# Altium PCB PCB10_10.PcbDoc
Units mil, origin at the board's own origin, x right, y up, seen from the top; angles counter-clockwise.
Board outline 6000 x 4000 mil, 2 copper layers (Top Layer, Bottom Layer); 13 components, 30 nets, 197 pads, 7 vias.
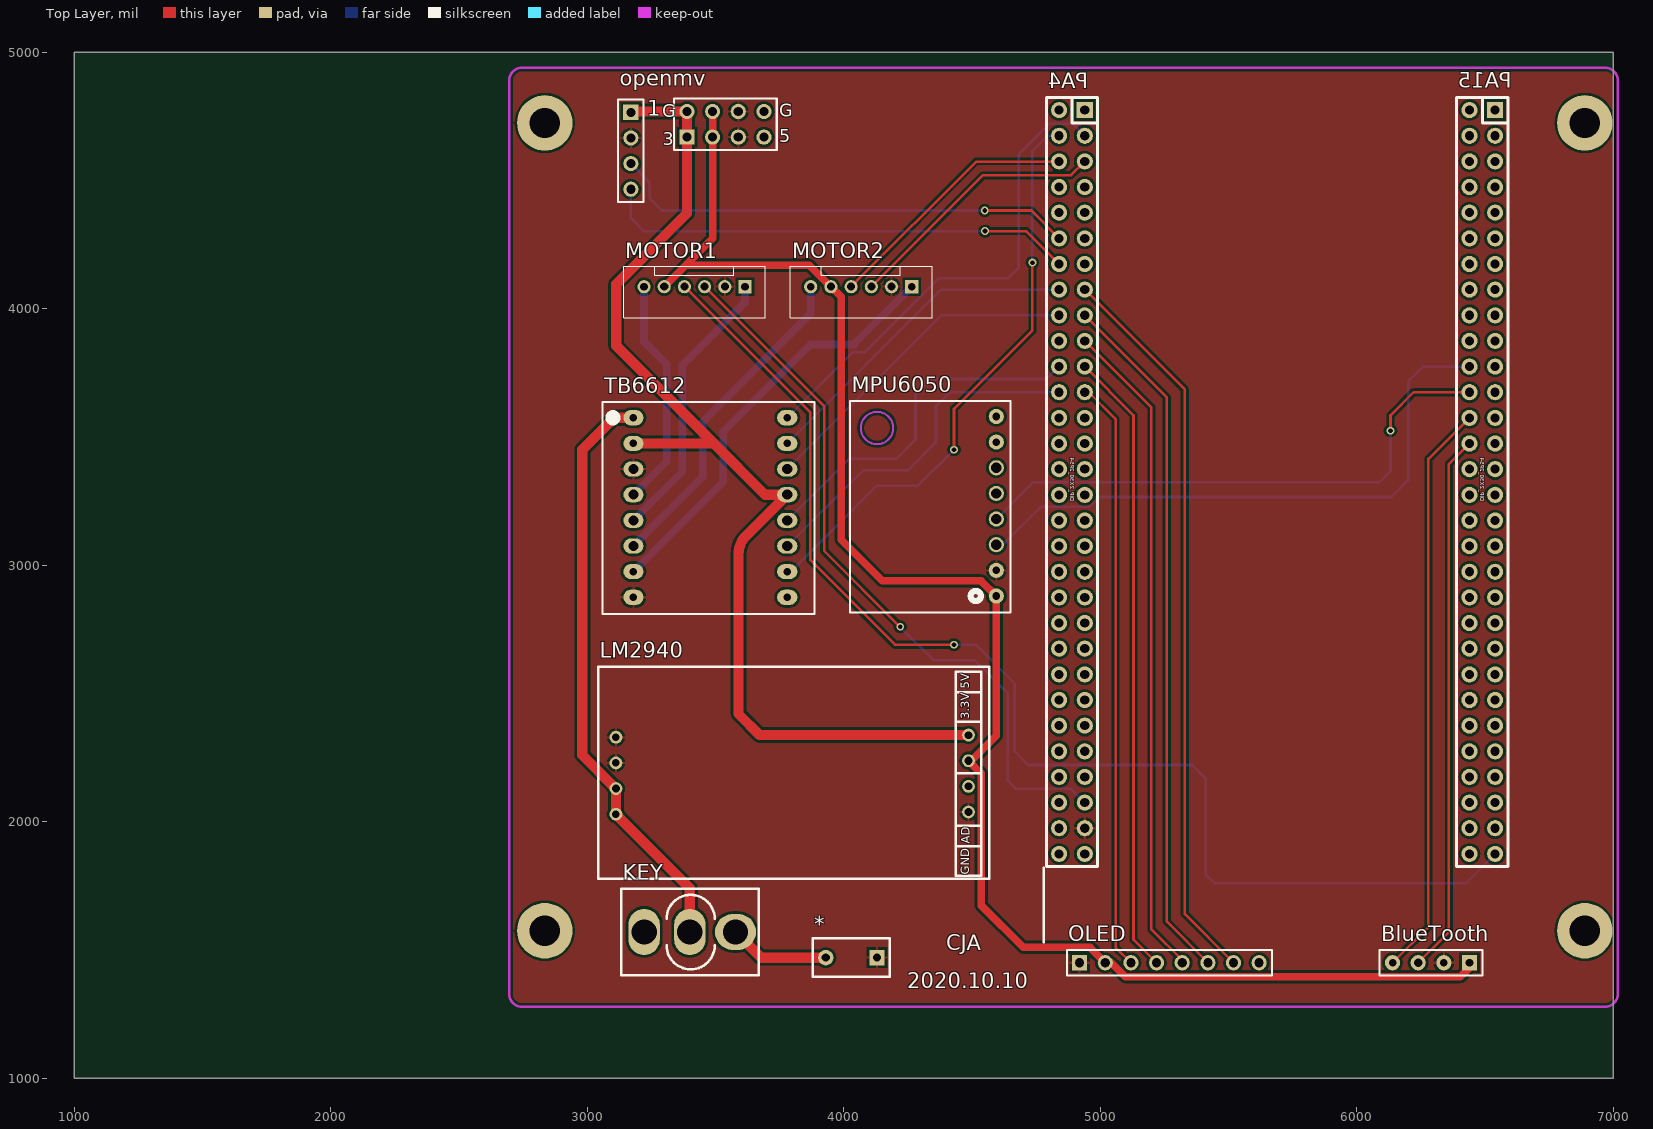
[diagram p0: Top Layer view]
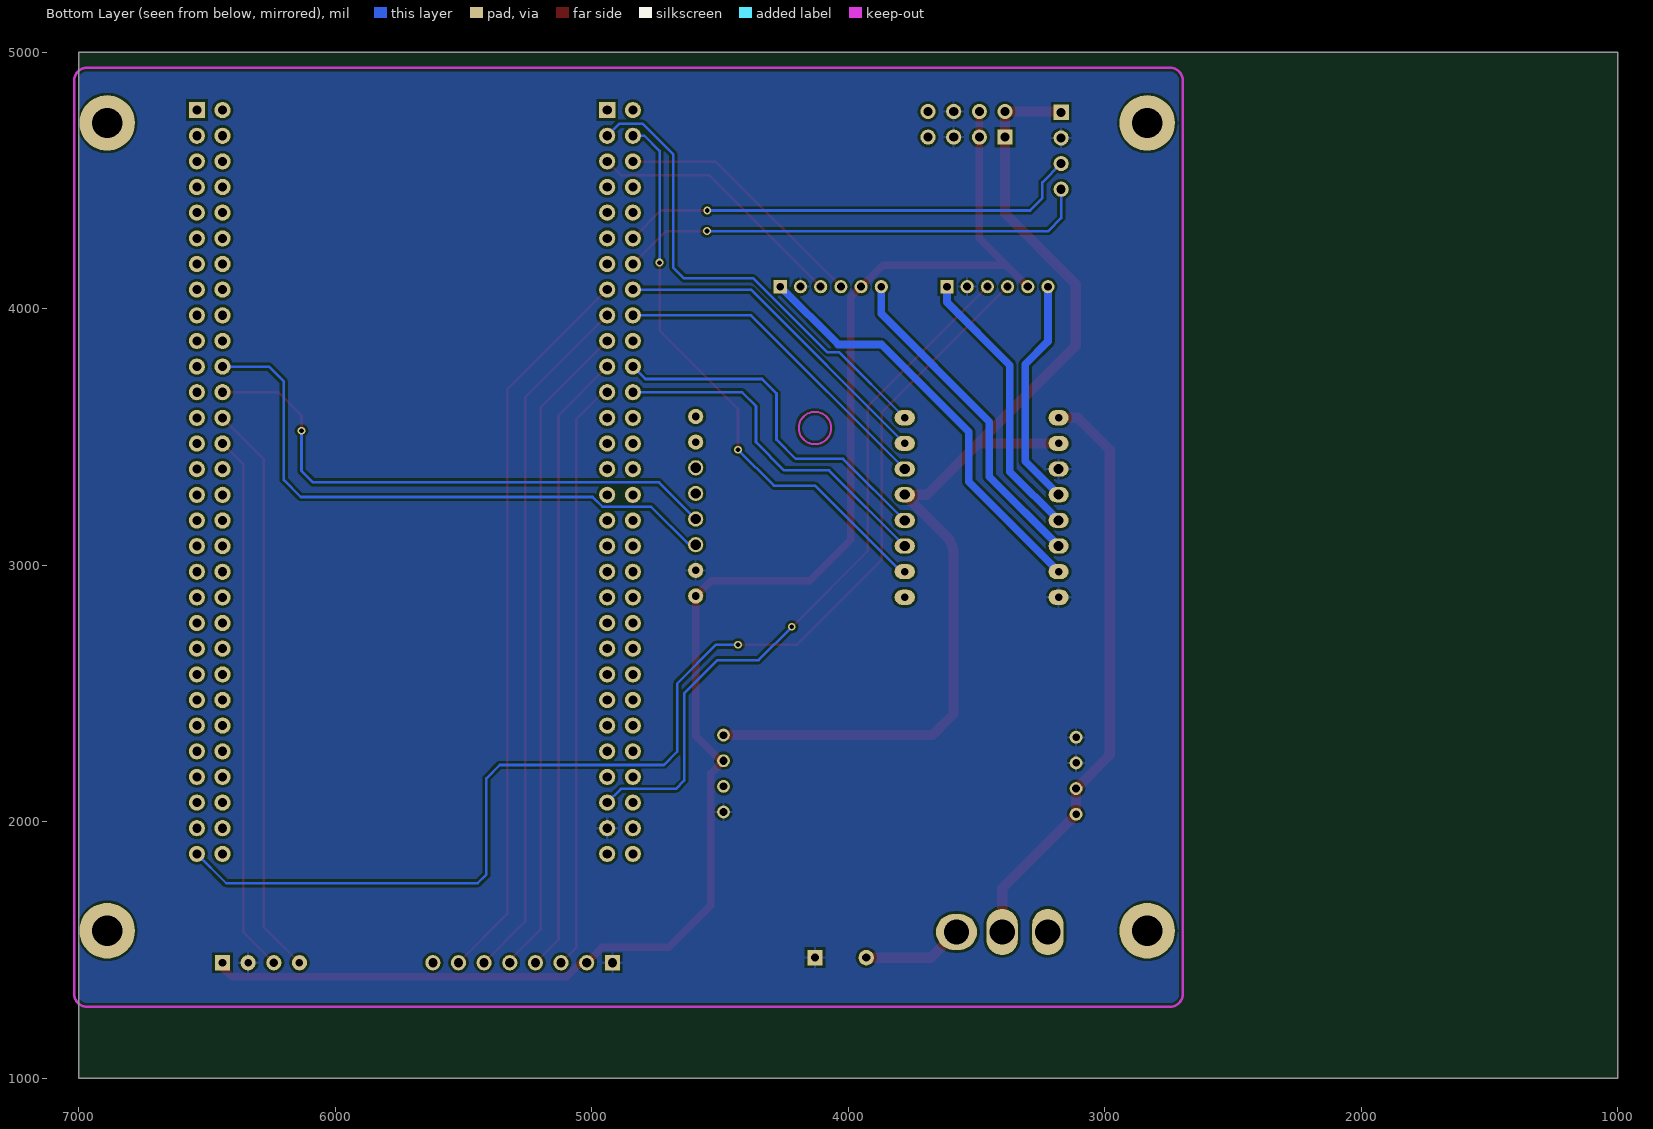
[diagram p1: Bottom Layer view, seen from below]

## Layer stack, top to bottom
Top Solder: solder mask 0.4, Solder Resist, Dk 3.5
Top Layer: signal copper 1.4
Dielectric 1: dielectric 12.6, FR-4, Dk 4.8
Bottom Layer: signal copper 1.4
Bottom Solder: solder mask 0.4, Solder Resist, Dk 3.5

## Board outline
1000,1000 7000,1000 7000,5000 1000,5000

## Design rules (kind name [scope] priority, off if disabled: settings)
Clearance [All] p1: gap=10
PolygonConnect [All] p1: connectstyle=Relief reliefconductorwidth=10 reliefentries=4 polygonreliefangle="90 Angle" airgapwidth=10
RoutingVias [All] p1: holewidth=28 width=50 viastyle="Through Hole" minholewidth=28 minwidth=50 maxholewidth=28 maxwidth=50
SolderMaskExpansion [All] p1: expansion=4
Width [All] p1: maxlimit=50 minlimit=10 preferedwidth=10
29 further rules are at their usual default settings.

## Components (designator, comment, footprint, x,y, rotation, side; value= is the part's Value field where it differs from the comment)
1 "Header 4X2" HDR2X4 3389,4669 r0 top
* "POWER_IN" POWER_IN 3930,1470 r0 top
BlueTooth "BLUETOOTH" HDR1X4-蓝牙模块 6440,1450 r180 top
KEY "K1" Switch_N 3400,1570 r90 top
LM2940 "LM2940" 9VTO5V3.3V稳压模块 3840,2210 r0 top
MOTOR1 "MOTOR" PH-2.0-6P-电机连接座子 3380,4170 r270 top
MOTOR2 "MOTOR" PH-2.0-6P-电机连接座子 4030,4170 r270 top
MPU6050 "MPU6050" MPU6050_模块 4650,3640 r180 top
OLED "Header 8" HDR1X8 4920,1450 r0 top
openmv "Header 4" HDR1X4 3170,4766 r270 top
PA4 "DIP_2X30_2P54" DIP-2X302P54 4890,3315 r90 top
PA15 "DIP_2X30_2P54" DIP-2X302P54 6490,3315 r90 top
TB6612 "TB6612" TB6612_模块 3060,2810 r0 top

## Footprints (in the part's own frame and the unit in brackets; to place one, negate y for a bottom-side part, rotate by r counter-clockwise, add the part's x,y. Pads: shape width x height; smd on the part's side, far side on the other; paste and mask are expansions set on the pad)
9VTO5V3.3V稳压模块 [mm]
  round 1.27 hole 0.75: 1(-18.495,3.025) 2(-18.495,0.485) 4(-18.495,-4.595) 5(16.424,-4.377) 6(16.424,-1.837) 8(16.424,3.243)
  round 1.27 hole 0.813: 3(-18.495,-2.055) 7(16.424,0.703)
  silkscreen extent -20.25,-11 18.5,10, body extent -19.74,-5.87 17.67,4.51, height 8.2
DIP-2X302P54 [mil] "DIP-2X302P54"
  rect 62.99x62.99 / inner round 60 / far side rect 62.99x62.99 hole 35.43: 1(1459.5,-50)
  round 62.99 / inner round 60 / far side round 62.99 hole 35.43: 2(1459.5,50) 3(1359.5,-50) 4(1359.5,50) 5(1259.5,-50) 6(1259.5,50) 7(1159.5,-50) 8(1159.5,50) 9(1059.5,-50) 10(1059.5,50) 11(959.5,-50) 12(959.5,50) 13(859.5,-50) 14(859.5,50) 15(759.5,-50) 16(759.5,50) 17(659.5,-50) 18(659.5,50) 19(559.5,-50) 20(559.5,50) 21(459.5,-50) 22(459.5,50) 23(359.5,-50) 24(359.5,50) 25(259.5,-50) 26(259.5,50) 27(159.5,-50) 28(159.5,50) 29(59.5,-50) 30(59.5,50) 31(-40.5,-50) 32(-40.5,50) 33(-140.5,-50) 34(-140.5,50) 35(-240.5,-50) 36(-240.5,50) 37(-340.5,-50) 38(-340.5,50) 39(-440.5,-50) 40(-440.5,50) 41(-540.5,-50) 42(-540.5,50) 43(-640.5,-50) 44(-640.5,50) 45(-740.5,-50) 46(-740.5,50) 47(-840.5,-50) 48(-840.5,50) 49(-940.5,-50) 50(-940.5,50) 51(-1040.5,-50) 52(-1040.5,50) 53(-1140.5,-50) 54(-1140.5,50) 55(-1240.5,-50) 56(-1240.5,50) 57(-1340.5,-50) 58(-1340.5,50) 59(-1440.5,-50) 60(-1440.5,50)
  silkscreen extent -1490,-100 1510,100
HDR1X4 [mm]
  rect 1.5x1.5 hole 0.9: 1(0,0)
  round 1.5 hole 0.9: 2(2.54,0) 3(5.08,0) 4(7.62,0)
  silkscreen extent -1.27,-1.27 8.89,1.27
HDR1X4-蓝牙模块 [mm] "Connector; Header; 4 Position"
  rect 1.5x1.5 hole 0.75: 1(0,0)
  round 1.5 hole 0.75: 2(2.54,0) 4(7.62,0)
  round 1.5 hole 0.813: 3(5.08,0)
  silkscreen extent -1.27,-1.27 8.89,1.27
HDR1X8 [mm]
  rect 1.5x1.5 hole 0.9: 1(0,0)
  round 1.5 hole 0.9: 2(2.54,0) 3(5.08,0) 4(7.62,0) 5(10.16,0) 6(12.7,0) 7(15.24,0) 8(17.78,0)
  silkscreen extent -1.27,-1.27 19.05,1.27
HDR2X4 [mm]
  rect 1.5x1.5 hole 0.9: 1(0,0)
  round 1.5 hole 0.9: 2(0,2.54) 3(2.54,0) 4(2.54,2.54) 5(5.08,0) 6(5.08,2.54) 7(7.62,0) 8(7.62,2.54)
  silkscreen extent -1.27,-1.27 8.89,3.81
MPU6050_模块 [mm]
  round 1.5 hole 0.75: 1(1.397,19.304) 2(1.397,16.764) 7(1.397,4.064) 8(1.397,1.524)
  round 1.5 hole 1: 3(1.397,14.224) 4(1.397,11.684) 5(1.397,9.144) 6(1.397,6.604)
  Keep-Out Layer circle w0.203: c13.208,2.667 r1.6
  silkscreen extent 0,0 15.88,20.96
PH-2.0-6P-电机连接座子 [mm]
  rect 1.3x1.3 hole 0.75: 1(2.135,5.973)
  round 1.3 hole 0.8: 2(2.135,3.973) 3(2.135,1.973) 4(2.135,-0.027) 5(2.135,-2.027)
  round 1.3 hole 0.75: 6(2.135,-4.027)
  silkscreen extent 0.13,-6.06 5.21,7.99, body extent 0.13,-6.11 5.21,8.04, height 3
POWER_IN [mil]
  round 60 hole 32: 1(0,0)
  rect 60x60 hole 32: 2(200,0)
  silkscreen extent -50,-75 250,75
Switch_N [mm]
  oval 3.556x4.064 hole 2.5: 1(0,-4.521)
  oval 4.6x3.1 hole 2.5: 2(0,0) 3(0,4.521)
  silkscreen extent -4.29,-6.81 4.27,6.78, body extent -4.14,-6.63 3.86,6.57, height 28.35
TB6612_模块 [mm]
  oval 2x1.5 hole 0.75: 1(3.048,19.431) 2(3.048,16.891) 7(3.048,4.191) 8(3.048,1.651) 10(18.288,4.191) 15(18.288,16.891) 16(18.288,19.431)
  oval 2x1.5 hole 1: 3(3.048,14.351) 4(3.048,11.811) 5(3.048,9.271) 6(3.048,6.731) 11(18.288,6.731) 12(18.288,9.271) 13(18.288,11.811) 14(18.288,14.351)
  oval 2x1.5 hole 0.737: 9(18.288,1.651)
  silkscreen extent 0,0 21,21

## Part data
1: "Header, 4-Pin, Dual row"
KEY: library part SW-SPST, "Single-Pole, Single-Throw Switch"
OLED: "Header, 8-Pin"
openmv: "Header, 4-Pin"
PA4 PA15: library part DIP_2X40_0

## Free pads (board coordinates)
  round 216.54 / inner round 60 / far side round 216.54 hole 118.11: 0(2834.65,1574.8) 0(2834.65,4724.41) 0(6889.76,1574.8) 0(6889.76,4724.41)

## Via types
v1: diameter 30, hole 18, Top Layer to Bottom Layer, 7 vias

## Nets (pads, with @x,y where several pads share a name; then routed paths per layer and width w, separated by ;. In a path a pad name is that pad's centre, name@x,y a point inside that pad or via, vN(x,y) a via of type N, cw(c..) or ccw(c..) an arc to the next point about the centre after c; other vN are vias at no path point)
3V3: 1.3 1.4 BlueTooth.1 LM2940.7 MOTOR1.5 MOTOR2.5 MPU6050.1 OLED.2 | length 6391.5
  Top Layer w30: MOTOR1.5 3384.25,4170 ; 1.4 1.3 3489,4274.75 3384.25,4170 ; BlueTooth.1 6440,1430.94 6404.53,1395.47 5097.41,1395.47 5042.89,1450 OLED.2 4960,1510 4700,1510 4536.61,1673.39 4536.61,2187.68 LM2940.7 4497.68,2237.68 4595,2335 MPU6050.1 4535,2940 4150,2940 3990,3100 3990,4046.14 MOTOR2.5 3866.14,4170 3384.25,4170
5V: 1.1 1.2 LM2940.8 openmv.1 TB6612.2 TB6612.13 | length 4328.9
  Top Layer w40: openmv.1 3173,4769 1.2 1.1 3389,4372 3113,4096 3113,3855 3493,3475 ; TB6612.2 3493,3475 ; LM2940.8 3672.32,2337.68 3590,2420 3590,3043.58 cw(c3690,3043.58) 3619.29,3114.29 TB6612.13 3693,3275 3493,3475
AIN1: PA4.18 TB6612.14 | length 1308.3
  Bottom Layer w10: TB6612.14 4379.5,3974.5 PA4.18
AIN2: PA4.16 TB6612.15 | length 1308.3
  Bottom Layer w10: TB6612.15 4379.5,4074.5 PA4.16
AO1: MOTOR1.6 TB6612.4 | length 901.5
  Bottom Layer w30: TB6612.4 3310,3405 3310,3784 3221.46,3872.54 MOTOR1.6
AO2: MOTOR1.1 TB6612.5 | length 1091.2
  Bottom Layer w30: TB6612.5 3370,3365 3370,3780 3615.16,4025.16 MOTOR1.1
BIN1: PA4.22 TB6612.12 | length 1413.8
  Bottom Layer w10: TB6612.12 4020,3415 4205,3415 4280,3490 4280,3670 4336,3726 4791.5,3726 PA4.22
BIN2: PA4.24 TB6612.11 | length 1390.3
  Bottom Layer w10: TB6612.11 4075,3370 4250,3370 4360,3480 4360,3620 4414.5,3674.5 PA4.24
BLUETOOTH_RX: BlueTooth.4 PA15.26 | length 2248.8
  Top Layer w10: BlueTooth.4 6280,1590 6280,3414.5 PA15.26
BLUETOOTH_TX: BlueTooth.3 PA15.28 | length 2107.3
  Top Layer w10: BlueTooth.3 6360,1570 6360,3394.5 PA15.28
BO1: MOTOR2.1 TB6612.7 | length 1659.6
  Bottom Layer w30: TB6612.7 3530,3325 3530,3520 3870.79,3860.79 4040,3860.79 MOTOR2.1
BO2: MOTOR2.6 TB6612.6 | length 1297.4
  Bottom Layer w30: TB6612.6 3450,3345 3450,3560 3871.46,3981.46 MOTOR2.6
CAM_RX: openmv.3 PA4.12 | length 1827.1
  Top Layer w10: v1(4550,4383) 4731.5,4383 PA4.12
  Bottom Layer w10: openmv.3 3243,4493 3243,4431 3291,4383 v1(4550,4383)
CAM_TX: openmv.4 PA4.14 | length 1856.9
  Top Layer w10: v1(4551,4303) 4711.5,4303 PA4.14
  Bottom Layer w10: openmv.4 3170,4353 3220,4303 v1(4551,4303)
GND: 1.5 1.6 *.2 BlueTooth.2 LM2940.1 LM2940.2 LM2940.5 MOTOR1.2 MOTOR2.2 MPU6050.2 OLED.1 openmv.2 PA4.57 TB6612.3 TB6612.8
I2C1_SCL: MPU6050.3 PA15.22 | length 2357.6
  Bottom Layer w10: MPU6050.3 4621,3080 4769.01,3228.01 4959.26,3228.01 4997.25,3266 6135,3266 6201,3332 6201,3716 6259.5,3774.5 PA15.22
I2C1_SDA: MPU6050.4 PA15.24 | length 2176.4
  Top Layer w10: v1(6132,3524) 6132,3584 6222.5,3674.5 PA15.24
  Bottom Layer w10: MPU6050.4 4738,3323 6087,3323 6132,3368 v1(6132,3524)
Net*_1: *.1 KEY.1 | length 393.4
  Top Layer w40: KEY.1 3678,1470 *.1
OLED_CLK: OLED.3 PA4.23 | length 2308.1
  Top Layer w10: PA4.23 4955.5,3674.5 5060,3570 5060,1510 OLED.3
OLED_CS: OLED.7 PA4.15 | length 2864.7
  Top Layer w10: PA4.15 5330,3684.5 5330,1640 OLED.7
OLED_DC: OLED.6 PA4.17 | length 2723.3
  Top Layer w10: PA4.17 5260,3654.5 5260,1610 OLED.6
OLED_DIN: OLED.4 PA4.21 | length 2440.5
  Top Layer w10: PA4.21 5130,3584.5 5130,1540 OLED.4
OLED_RES: OLED.5 PA4.19 | length 2571.9
  Top Layer w10: PA4.19 5200,3614.5 5200,1580 OLED.5@5320,1460
TIM2_CH1: MOTOR1.3 PA4.55 | length 2844.8
  Top Layer w10: MOTOR1.3 3923.62,3620 3923.62,3056.38 v1(4220,2760)
  Bottom Layer w10: v1(4220,2760) 4350,2630 4510,2630 4640,2500 4640,2160 4671.99,2128.01 4886.49,2128.01 PA4.55
TIM2_CH2: MOTOR1.4 PA15.59 | length 4883.6
  Top Layer w10: MOTOR1.4 3870,3594.88 3870,3020 4200,2690 v1(4430,2690)
  Bottom Layer w10: v1(4430,2690) 4515,2690 4667,2538 4667,2273 4719,2221 5359,2221 5411,2169 5411,1794 5445,1760 6425.5,1760 PA15.59
TIM3_CH1: PA4.3 TB6612.16 | length 1938.1
  Bottom Layer w10: TB6612.16 4035.79,3830.79 4082.39,3830.79 4370,4118.39 4640.39,4118.39 4683,4161 4683,4603 4800.99,4720.99 4893.51,4720.99 PA4.3 PA4.3@4914.75,4674.5
TIM3_CH2: PA4.4 TB6612.10 | length 2267.1
  Top Layer w10: v1(4430,3450) 4430,3610 4736,3916 v1(4736,4180)
  Bottom Layer w10: TB6612.10 3795,2975 4130,3310 4290,3310 v1(4430,3450) ; v1(4736,4180) 4736,4615 4795.5,4674.5 PA4.4
TIM4_CH1: MOTOR2.3 PA4.5 | length 1041.7
  Top Layer w10: MOTOR2.3 4542.73,4521 4886.5,4521 PA4.5 PA4.5@4940,4567.49
TIM4_CH2: MOTOR2.4 PA4.6 | length 1013.4
  Top Layer w10: MOTOR2.4 4516.99,4574 4839.5,4574 PA4.6
VCC_IN: KEY.2 LM2940.3 LM2940.4 TB6612.1 | length 2305
  Top Layer w40: TB6612.1 3105,3575 2980.92,3450.92 2980.92,2260 LM2940.3 LM2940.4 3400,1740.92 KEY.2
pads on no net: 1.7 1.8 KEY.3 LM2940.6 MPU6050.5 MPU6050.6 MPU6050.7 MPU6050.8 OLED.8 PA4.1 PA4.2 PA4.7 PA4.8 PA4.9 PA4.10 PA4.11 PA4.13 PA4.20 PA4.25 PA4.26 PA4.27 PA4.28 PA4.29 PA4.30 PA4.31 PA4.32 PA4.33 PA4.34 PA4.35 PA4.36 PA4.37 PA4.38 PA4.39 PA4.40 PA4.41 PA4.42 PA4.43 PA4.44 PA4.45 PA4.46 PA4.47 PA4.48 PA4.49 PA4.50 PA4.51 PA4.52 PA4.53 PA4.54 PA4.56 PA4.58 PA4.59 PA4.60 PA15.1 PA15.2 PA15.3 PA15.4 PA15.5 PA15.6 PA15.7 PA15.8 PA15.9 PA15.10 PA15.11 PA15.12 PA15.13 PA15.14 PA15.15 PA15.16 PA15.17 PA15.18 PA15.19 PA15.20 PA15.21 PA15.23 PA15.25 PA15.27 PA15.29 PA15.30 PA15.31 PA15.32 PA15.33 PA15.34 PA15.35 PA15.36 PA15.37 PA15.38 PA15.39 PA15.40 PA15.41 PA15.42 PA15.43 PA15.44 PA15.45 PA15.46 PA15.47 PA15.48 PA15.49 PA15.50 PA15.51 PA15.52 PA15.53 PA15.54 PA15.55 PA15.56 PA15.57 PA15.58 PA15.60 TB6612.9

## Polygon pours and split planes (outlines as drawn)
GND on Bottom Layer "Bottom Layer-No Net" (solid, pour order 4): 2695,4949 2695,1293 2719,1269 2736,1286 7019,1286 7019,4937 7026,4944
GND on Top Layer "Bottom Layer-No Net" (solid, pour order 2): 2692,4939 2696,4935 2696,1274 7026,1274 7001,1299 7001,4960

## Keep-outs
Keep-Out Layer:
  lines w10: 2696,1328 ccw(c2746,1328) 2746,1278 6968,1278 ccw(c6968,1328) 7018,1328 7018,4869 7018,4890 ccw(c6968,4890) 6968,4940 6764,4940 2746,4940 ccw(c2746,4890) 2696,4890 2696,1328

## Silkscreen, mask and mechanical layers (free items; w line width, h text height)
Top Overlay:
  lines w10: 4780,1530 4780,1820
  text "CJA" at 4400,1499 h60
  text "2020.10.10" at 4248,1350 h60

## Text inside footprints (layer, text, board x,y; h text height)
1: Top Overlay "G" at 3749,4749 h50; Top Overlay "5" at 3749,4649 h50; Top Overlay "3" at 3294,4638 h50; Top Overlay "G" at 3293,4747 h50
LM2940: Top Overlay "GND" at 4501.84,1794.08 h55 r90; Top Overlay "AD" at 4502.43,1913.21 h55 r90; Top Overlay "5V" at 4501.84,2519.08 h55 r90; Top Overlay "3.3V" at 4501.84,2399.08 h55 r90
PA4: Mechanical 9 "60" at 4840,1894.5 h25 r90; Mechanical 9 "7" at 4940,4484.5 h25 r90; Mechanical 9 "11" at 4940,4294.5 h25 r90; Mechanical 9 "33" at 4940,3194.5 h25 r90; Mechanical 9 "35" at 4940,3094.5 h25 r90; Mechanical 9 "12" at 4840,4294.5 h25 r90; Mechanical 9 "51" at 4940,2294.5 h25 r90; Mechanical 9 "45" at 4940,2594.5 h25 r90; Mechanical 9 "48" at 4840,2494.5 h25 r90; Mechanical 9 "40" at 4840,2894.5 h25 r90; Mechanical 9 "47" at 4940,2494.5 h25 r90; Mechanical 9 "36" at 4840,3094.5 h25 r90; Mechanical 9 "34" at 4840,3194.5 h25 r90; Mechanical 9 "50" at 4840,2394.5 h25 r90; Mechanical 9 "49" at 4940,2394.5 h25 r90; Mechanical 9 "16" at 4840,4094.5 h25 r90; Mechanical 9 "21" at 4940,3794.5 h25 r90; Mechanical 9 "25" at 4940,3594.5 h25 r90; Mechanical 9 "14" at 4840,4194.5 h25 r90; Mechanical 9 "39" at 4940,2894.5 h25 r90; Mechanical 9 "44" at 4840,2694.5 h25 r90; Mechanical 9 "43" at 4940,2694.5 h25 r90; Mechanical 9 "52" at 4840,2294.5 h25 r90; Mechanical 9 "18" at 4840,3994.5 h25 r90; Mechanical 9 "42" at 4840,2794.5 h25 r90; Mechanical 9 "41" at 4940,2794.5 h25 r90; Mechanical 9 "20" at 4840,3894.5 h25 r90; Mechanical 9 "56" at 4840,2094.5 h25 r90; Mechanical 9 "55" at 4940,2094.5 h25 r90; Mechanical 9 "53" at 4940,2194.5 h25 r90; Mechanical 9 "30" at 4840,3394.5 h25 r90; Mechanical 9 "27" at 4940,3494.5 h25 r90; Mechanical 9 "17" at 4940,3994.5 h25 r90; Mechanical 9 "23" at 4940,3694.5 h25 r90; Mechanical 9 "15" at 4940,4094.5 h25 r90; Mechanical 9 "31" at 4940,3294.5 h25 r90; Mechanical 9 "58" at 4840,1994.5 h25 r90; Mechanical 9 "54" at 4840,2194.5 h25 r90; Mechanical 9 "57" at 4940,1994.5 h25 r90; Mechanical 9 "32" at 4840,3294.5 h25 r90; Mechanical 9 "29" at 4940,3394.5 h25 r90; Mechanical 9 "24" at 4840,3694.5 h25 r90; Mechanical 9 "22" at 4840,3794.5 h25 r90; Mechanical 9 "5" at 4940,4584.5 h25 r90; Mechanical 9 "4" at 4840,4684.5 h25 r90; Mechanical 9 "10" at 4840,4394.5 h25 r90; Mechanical 9 "9" at 4940,4384.5 h25 r90; Mechanical 9 "8" at 4840,4484.5 h25 r90; Mechanical 9 "13" at 4940,4194.5 h25 r90; Mechanical 9 "28" at 4840,3494.5 h25 r90; Mechanical 9 "26" at 4840,3594.5 h25 r90; Mechanical 9 "19" at 4940,3894.5 h25 r90; Mechanical 9 "1" at 4940,4784.5 h25 r90; Mechanical 9 "2" at 4840,4784.5 h25 r90; Mechanical 9 "3" at 4940,4684.5 h25 r90; Mechanical 9 "38" at 4840,2994.5 h25 r90; Mechanical 9 "37" at 4940,2994.5 h25 r90; Mechanical 9 "59" at 4940,1894.5 h25 r90; Mechanical 9 "6" at 4840,4584.5 h25 r90; Mechanical 9 "46" at 4840,2594.5 h25 r90
PA15: Mechanical 9 "60" at 6440,1894.5 h25 r90; Mechanical 9 "7" at 6540,4484.5 h25 r90; Mechanical 9 "11" at 6540,4294.5 h25 r90; Mechanical 9 "33" at 6540,3194.5 h25 r90; Mechanical 9 "35" at 6540,3094.5 h25 r90; Mechanical 9 "12" at 6440,4294.5 h25 r90; Mechanical 9 "51" at 6540,2294.5 h25 r90; Mechanical 9 "45" at 6540,2594.5 h25 r90; Mechanical 9 "48" at 6440,2494.5 h25 r90; Mechanical 9 "40" at 6440,2894.5 h25 r90; Mechanical 9 "47" at 6540,2494.5 h25 r90; Mechanical 9 "36" at 6440,3094.5 h25 r90; Mechanical 9 "34" at 6440,3194.5 h25 r90; Mechanical 9 "50" at 6440,2394.5 h25 r90; Mechanical 9 "49" at 6540,2394.5 h25 r90; Mechanical 9 "16" at 6440,4094.5 h25 r90; Mechanical 9 "21" at 6540,3794.5 h25 r90; Mechanical 9 "25" at 6540,3594.5 h25 r90; Mechanical 9 "14" at 6440,4194.5 h25 r90; Mechanical 9 "39" at 6540,2894.5 h25 r90; Mechanical 9 "44" at 6440,2694.5 h25 r90; Mechanical 9 "43" at 6540,2694.5 h25 r90; Mechanical 9 "52" at 6440,2294.5 h25 r90; Mechanical 9 "18" at 6440,3994.5 h25 r90; Mechanical 9 "42" at 6440,2794.5 h25 r90; Mechanical 9 "41" at 6540,2794.5 h25 r90; Mechanical 9 "20" at 6440,3894.5 h25 r90; Mechanical 9 "56" at 6440,2094.5 h25 r90; Mechanical 9 "55" at 6540,2094.5 h25 r90; Mechanical 9 "53" at 6540,2194.5 h25 r90; Mechanical 9 "30" at 6440,3394.5 h25 r90; Mechanical 9 "27" at 6540,3494.5 h25 r90; Mechanical 9 "17" at 6540,3994.5 h25 r90; Mechanical 9 "23" at 6540,3694.5 h25 r90; Mechanical 9 "15" at 6540,4094.5 h25 r90; Mechanical 9 "31" at 6540,3294.5 h25 r90; Mechanical 9 "58" at 6440,1994.5 h25 r90; Mechanical 9 "54" at 6440,2194.5 h25 r90; Mechanical 9 "57" at 6540,1994.5 h25 r90; Mechanical 9 "32" at 6440,3294.5 h25 r90; Mechanical 9 "29" at 6540,3394.5 h25 r90; Mechanical 9 "24" at 6440,3694.5 h25 r90; Mechanical 9 "22" at 6440,3794.5 h25 r90; Mechanical 9 "5" at 6540,4584.5 h25 r90; Mechanical 9 "4" at 6440,4684.5 h25 r90; Mechanical 9 "10" at 6440,4394.5 h25 r90; Mechanical 9 "9" at 6540,4384.5 h25 r90; Mechanical 9 "8" at 6440,4484.5 h25 r90; Mechanical 9 "13" at 6540,4194.5 h25 r90; Mechanical 9 "28" at 6440,3494.5 h25 r90; Mechanical 9 "26" at 6440,3594.5 h25 r90; Mechanical 9 "19" at 6540,3894.5 h25 r90; Mechanical 9 "1" at 6540,4784.5 h25 r90; Mechanical 9 "2" at 6440,4784.5 h25 r90; Mechanical 9 "3" at 6540,4684.5 h25 r90; Mechanical 9 "38" at 6440,2994.5 h25 r90; Mechanical 9 "37" at 6540,2994.5 h25 r90; Mechanical 9 "59" at 6540,1894.5 h25 r90; Mechanical 9 "6" at 6440,4584.5 h25 r90; Mechanical 9 "46" at 6440,2594.5 h25 r90